# Altium PCB FC_V3_0_PCB_2021-06-05_17-41-46.pcbdoc
Units mil, origin at the board's own origin, x right, y up, seen from the top; angles counter-clockwise.
Board outline 4853.59 x 4855.51 mil, 2 copper layers (Top Layer, Bottom Layer); 91 components, 99 nets, 354 pads, 199 vias.
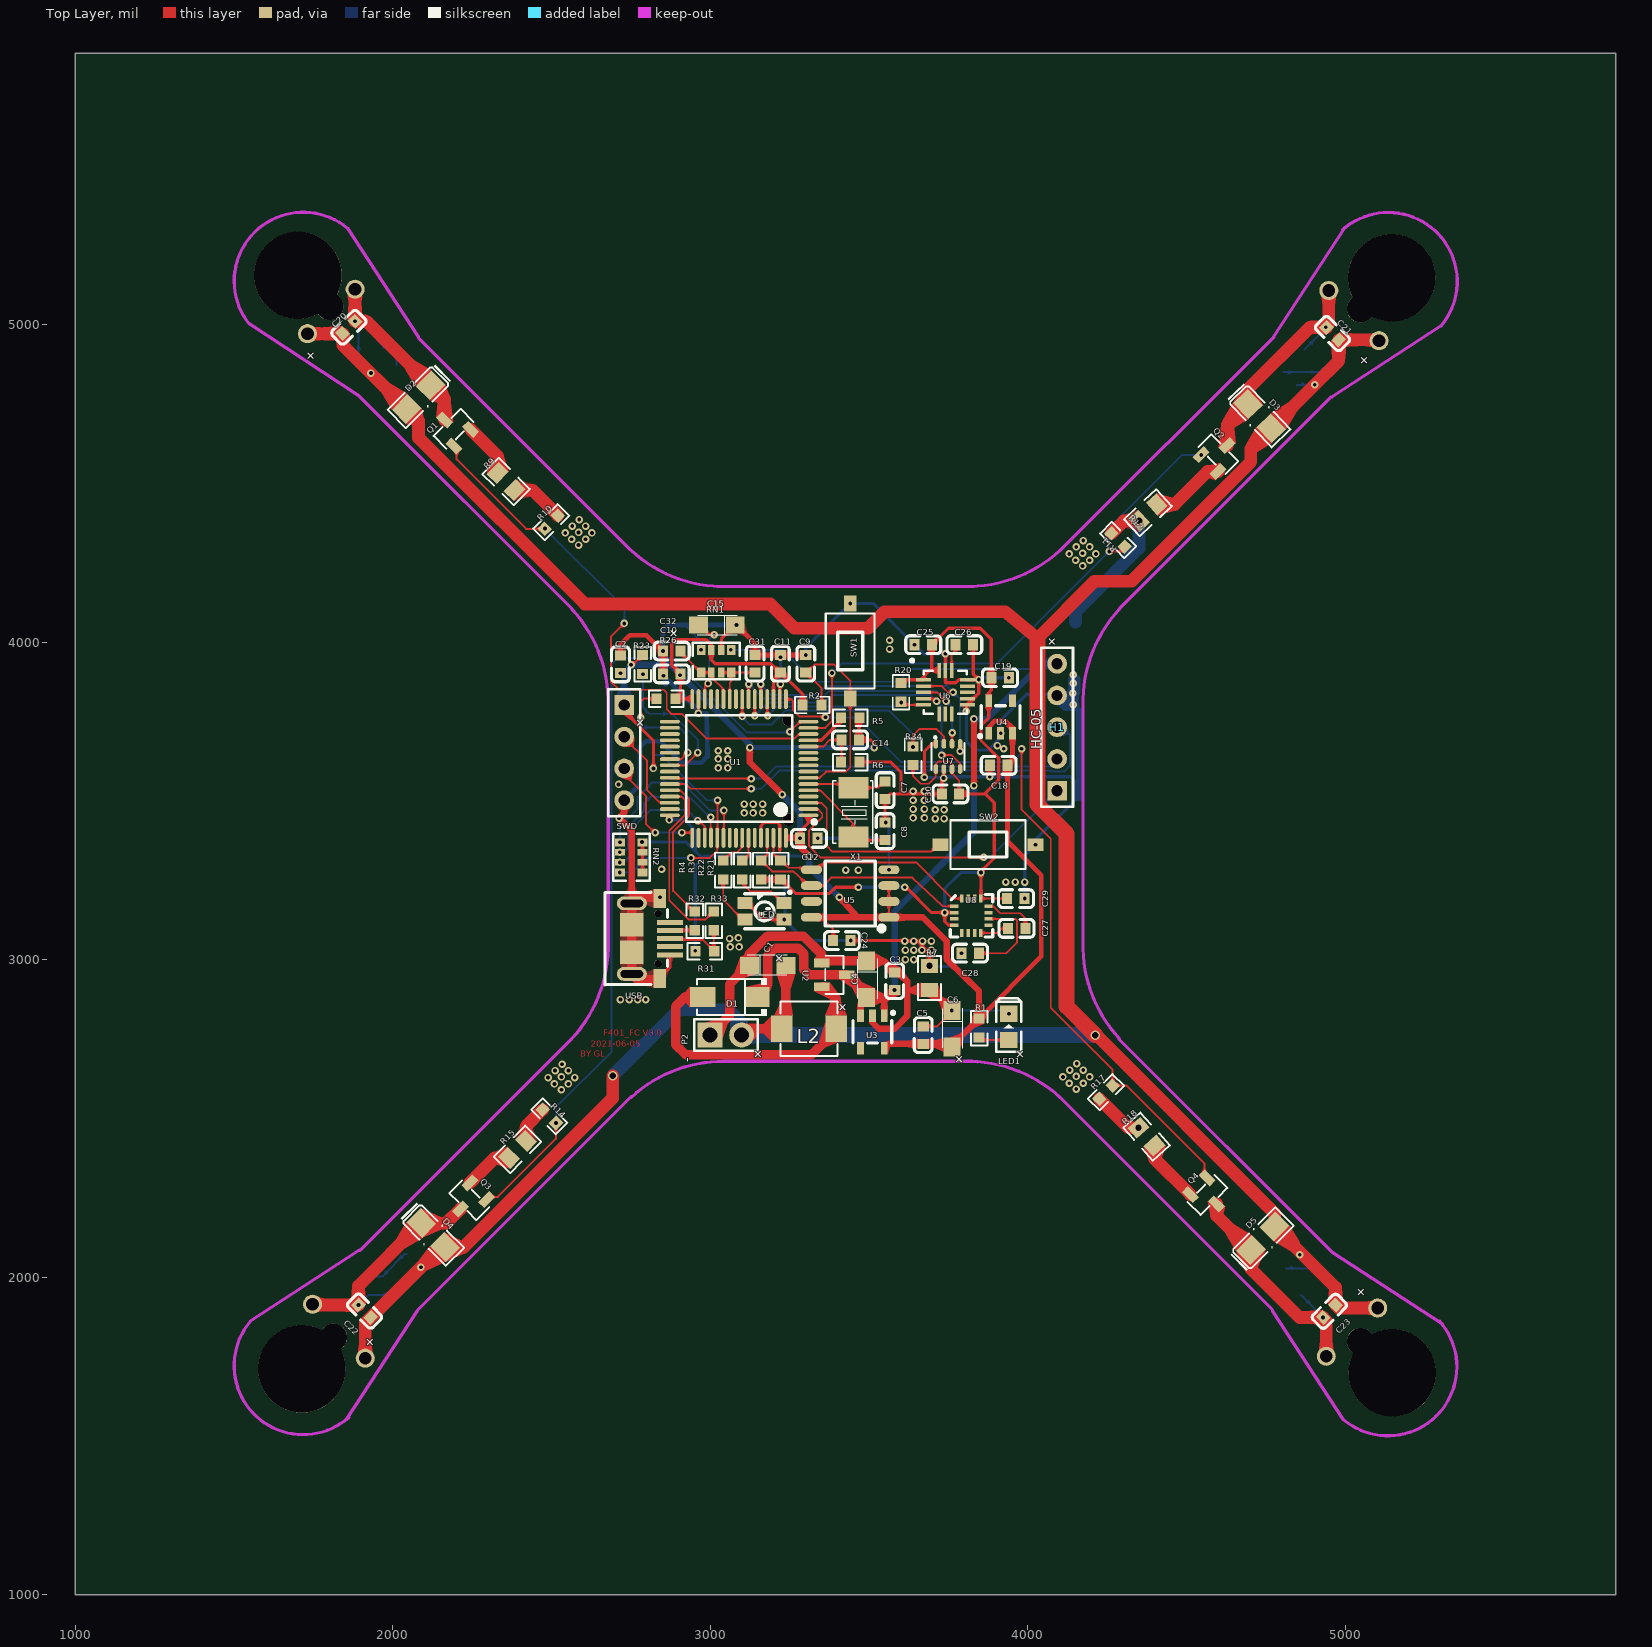
[diagram p0: Top Layer view]
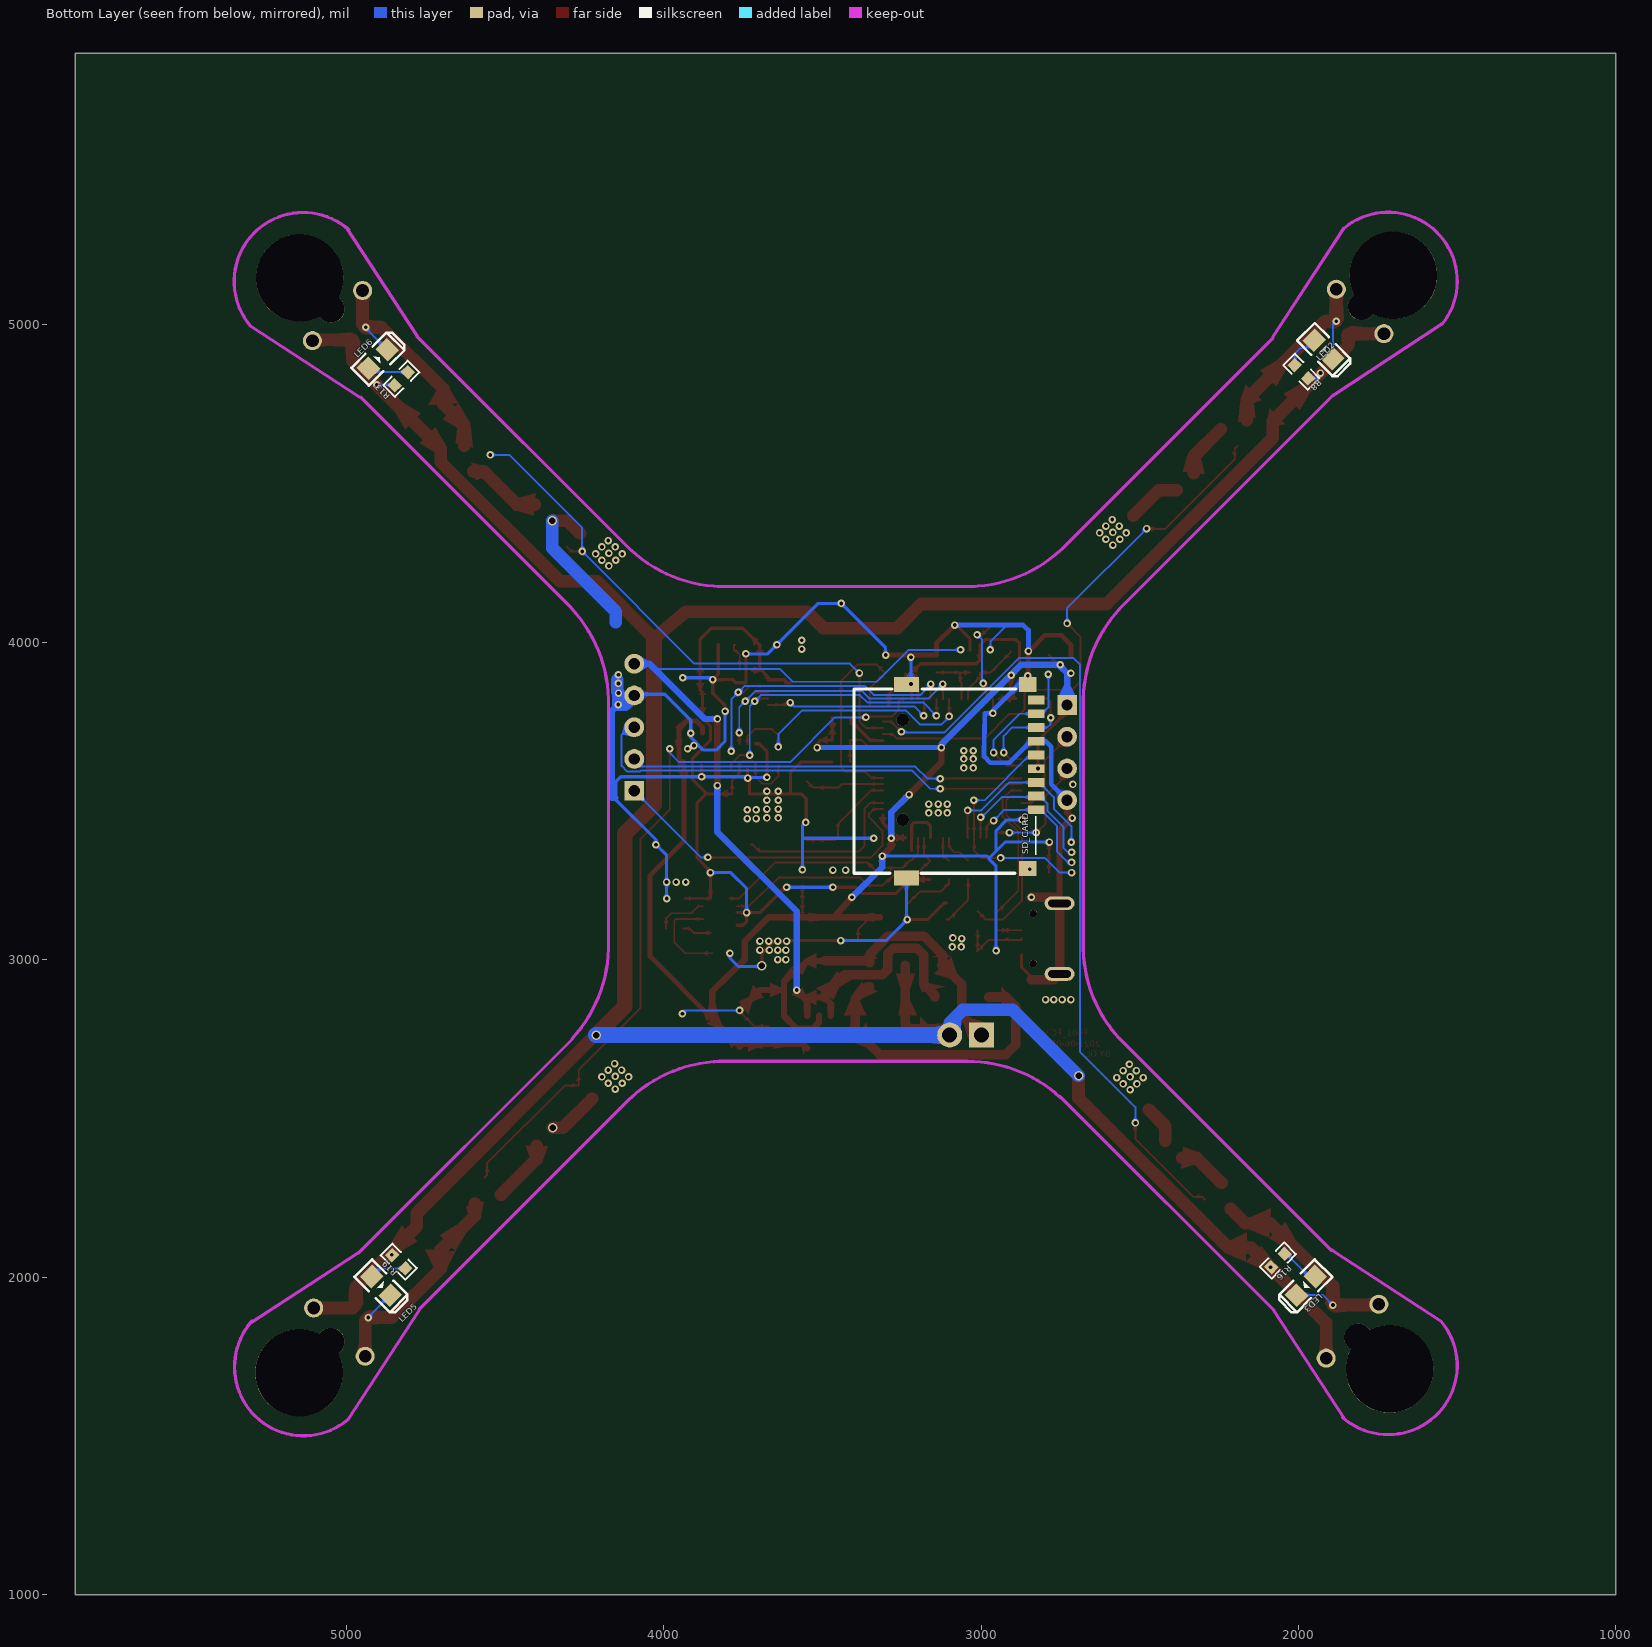
[diagram p1: Bottom Layer view, seen from below]

## Layer stack, top to bottom
Top Layer: signal copper (thickness not stored)
Dielectric: dielectric 12.6, FR-4, Dk 4.8
Bottom Layer: signal copper (thickness not stored)

## Board outline
5853.59,1000 1000,1000 1000,5855.51 5853.59,5855.51

## Components (designator, comment, footprint, x,y, rotation, side; value= is the part's Value field where it differs from the comment)
C1 "220uF" CASE-A_3216 3181.01,2982.67 r0 top
C2 "104" C0603 2717.01,3930.67 r270 top
C3 "104" C0603 3581.01,2932.67 r270 top
C4 "220uF" CASE-A_3216 3493.01,2938.67 r270 top
C5 "104" C0603 3671.01,2762.67 r270 top
C6 "220uF" CASE-A_3216 3761.01,2782.67 r270 top
C7 "20pF" C0603 3551.01,3534.67 r90 top
C8 "20pF" C0603 3551.01,3404.67 r270 top
C9 "104" C0603 3301.01,3932.67 r270 top
C10 "104" C0603 2879.01,3900.67 r0 top
C11 "104" C0603 3221.01,3932.67 r270 top
C12 "104" C0603 3311.01,3382.67 r180 top
C14 "104" C0603 3441.01,3692.67 r0 top
C15 "2.2uF" CASE-A_3216 3021.01,4054.67 r180 top
C18 "104" C0603 3909.01,3612.67 r0 top
C19 "104" C0603 3913.01,3888.67 r180 top
C20 "104" C0603 1861.01,4992.67 r224 top
C21 "104" C0603 4961.01,4972.67 r315 top
C22 "104" C0603 1911.01,1892.67 r315 top
C23 "104" C0603 4951.01,1892.67 r45 top
C24 "104" C0603 3415.01,3060.67 r180 top
C25 "104" C0603 3671.01,3992.67 r180 top
C26 "104" C0603 3801.01,3992.67 r0 top
C27 "0.22uF" C0603 3965.01,3098.67 r0 top
C28 "4.7uF" C0603 3819.01,3020.67 r0 top
C29 "104" C0603 3963.01,3192.67 r180 top
C30 "104" C0603 3757.01,3522.67 r0 top
C31 "104" C0603 3141.01,3932.67 r270 top
C32 "104" C0603 2879.01,3972.67 r0 top
D1 "SS14A" SMA_L4.3-W2.6-LS5.2-RD 3061.01,2882.67 r180 top
D2 "1N4148" D1206-RD 2081.01,4772.67 r225 top
D3 "1N4148" D1206-RD 4731.01,4712.67 r314 top
D4 "1N4148" D1206-RD 2127.01,2132.67 r315 top
D5 "1N4148" D1206-RD 4741.01,2122.67 r45 top
H1 "BLUETOOTH" HDR-F-2.54_1X5 4093.01,3732.67 r90 top
L2 "10uH" IND-SMD_L4.4-W4.2 3311.01,2782.67 r180 top
LED "RG" LED-ARRAY-SMD_3528-4P-L3.5-W2.8-TR 3171.01,3152.67 r0 top
LED1 "LED-0805_R" LED0805_RED#1 3941.01,2788.67 r90 top
LED2 "LED-0805_R" LED0805_RED#2 1921.01,4922.67 r45 bottom
LED3 "LED-0805_B" LED0805_BLUE 1977.01,1972.67 r135 bottom
LED5 "LED-0805_R" LED0805_RED#2 4891.01,1972.67 r45 bottom
LED6 "LED-0805_G" LED0805_GREEN 4901.01,4892.67 r315 bottom
P2 "3.7V 400mAH" HDR-TH_2P-P2.54-V-M 3049.01,2762.67 r0 top
Q1 "SI2302" SOT-23-3_L2.9-W1.3-P1.90-LS2.4-BR 2191.01,4672.67 r315 top
Q2 "SI2302" SOT-23-3_L2.9-W1.3-P1.90-LS2.4-BR 4601.01,4592.67 r225 top
Q3 "SI2302" SOT-23-3_L2.9-W1.3-P1.90-LS2.4-BR 2241.01,2242.67 r45 top
Q4 "SI2302" SOT-23-3_L2.9-W1.3-P1.90-LS2.4-BR 4567.01,2258.67 r135 top
R1 "4.7k" R0603#1 3847.01,2784.67 r270 top
R2 "10K" R0603#1 3321.01,3802.67 r180 top
R3 "4.7K" R0603#1 3101.01,3282.67 r90 top
R4 "4.7K" R0603#1 3041.01,3282.67 r90 top
R5 "0" R0603#1 3441.01,3762.67 r0 top
R6 "0" R0603#1 3441.01,3622.67 r0 top
R7 "0" R0805 3691.01,2942.67 r90 top
R8 "4.7k" R0603#2 1991.01,4852.67 r45 bottom
R9 "0" R0805 2357.01,4506.67 r315 top
R10 "10K" R0603#1 2499.01,4378.67 r225 top
R11 "10K" R0603#1 4285.01,4322.67 r315 top
R12 "0" R0805 4379.01,4408.67 r223 top
R13 "4.7k" R0603#2 4827.01,4830.67 r135 bottom
R14 "10K" R0603#1 2493.01,2506.67 r315 top
R15 "0" R0805 2393.01,2402.67 r45 top
R16 "4.7k" R0603#2 2065.01,2052.67 r135 bottom
R17 "10K" R0603#1 4247.01,2582.67 r45 top
R18 "0" R0805 4375.01,2442.67 r132 top
R19 "4.7k" R0603#2 4835.01,2048.67 r225 bottom
R20 "4.7k" R0603#1 3601.01,3842.67 r90 top
R21 "4.7K" R0603#1 3221.01,3282.67 r90 top
R22 "4.7K" R0603#1 3161.01,3282.67 r90 top
R23 "10K" R0603#1 2787.01,3930.67 r270 top
R26 "10K" R0603#1 2861.01,3822.67 r180 top
R31 "1.5k" R0603#1 2983.01,3026.67 r180 top
R32 "22" R0603#1 2951.01,3122.67 r90 top
R33 "22" R0603#1 3011.01,3122.67 r90 top
R34 "4.7k" R0603#1 3639.01,3642.67 r90 top
RN1 "100K" RES-ARRAY-SMD_0603-8P-L3.2-W1.6-BL 3019.01,3940.67 r0 top
RN2 "10K" RES-ARRAY-SMD_0603-8P-L3.2-W1.6-BL 2751.01,3322.67 r270 top
SD_CARD "TF-01A" TF-SMD_TF-01A 3031.01,3562.64 r90 bottom
SW1 "RESET" SW-SMD_L6.0-W3.9-LS7.7 3441.01,3972.67 r90 top
SW2 "MODE" SW-SMD_L6.0-W3.9-LS7.7 3875.01,3362.67 r0 top
SWD "SWD" HDR-M-2.54_1X4 2729.01,3652.67 r270 top
U1 "STM32F401RCT6" LQFP-64_L10.0-W10.0-P0.50-LS12.0-BL 3091.01,3602.67 r90 top
U2 "ME2108A50M3G" SOT-23-3_L2.9-W1.3-P1.90-LS2.4-BR 3391.01,2952.67 r180 top
U3 "RT9013-33GB" SOT-23-5_L3.0-W1.7-P0.95-LS2.8-BR 3511.01,2772.67 r90 top
U4 "RT9013-33GB" SOT-23-5_L3.0-W1.7-P0.95-LS2.8-BR 3915.01,3764.67 r270 top
U5 "AIP24C02" SOP-8_L5.0-W4.0-P1.27-LS6.2-BL 3441.01,3208.67 r90 top
U6 "ICM-20602" LGA-16_L3.0-W3.0-ICM20602 3741.01,3842.67 r270 top
U7 "BMP280" SENSOR-TH_BMP280-BL 3749.01,3640.67 r270 top
U8 "C-HMC5883L" C-LCC16 3823.01,3138.67 r0 top
USB "MICRO5.9MMUSB" MICRO-USB-SMD_5P-P0.65-H-F_MICRO5.9MMUSB 2812.99,3066.71 r270 top
X1 "8MHz" SMD-5032_2P 3451.05,3464.63 r270 top

## Footprints (in the part's own frame and the unit in brackets; to place one, negate y for a bottom-side part, rotate by r counter-clockwise, add the part's x,y. Pads: shape width x height; smd on the part's side, far side on the other; paste and mask are expansions set on the pad)
C0603 [mm]
  rect 0.8x0.9 smd: 1(-0.7,0) 2(0.7,0)
  silkscreen extent -1.41,-0.71 1.39,0.72
C-LCC16 [mil]
  rect 25.6x11 smd: 1(-54,30) 2(-54,10) 3(-54,-10) 4(-54,-30) 9(54,-30) 10(54,-10) 11(54,10) 12(54,30)
  rect 11x25.6 smd: 5(-30,-54) 6(-10,-54) 7(10,-54) 8(30,-54) 13(30,54) 14(10,54) 15(-10,54) 16(-30,54)
  silkscreen extent -67,-67 67,67
CASE-A_3216 [mil]
  rect 59.05x53.5 smd: 1(57.61,0)
  rect 59.06x53.5 smd: 2(-57.61,0)
  silkscreen extent -65,-30 61,33
D1206-RD [mm]
  rect 1.785x1.62 smd: 1(-1.343,0) 2(1.342,0)
  silkscreen extent -2.77,-1.08 2.46,1.08
HDR-F-2.54_1X5 [mil]
  rect 62x62 hole 35: 1(-200,0)
  round 62 hole 35: 2(-100,0) 3(0,0) 4(100,0) 5(200,0)
  silkscreen extent -250,-50 250,50
HDR-M-2.54_1X4 [mil]
  rect 62x62 hole 35: 1(-150,0)
  round 62 hole 35: 2(-50,0) 3(50,0) 4(150,0)
  silkscreen extent -200,-50 200,50
HDR-TH_2P-P2.54-V-M [mm]
  rect 2x2 hole 1.2: 1(-1.27,0)
  round 2 hole 1.2: 2(1.27,0)
  silkscreen extent -2.54,-1.27 2.54,1.27
IND-SMD_L4.4-W4.2 [mm]
  rect 1.724x2.12 smd: 1(2.178,0) 2(-2.178,0)
  silkscreen extent -2.28,-2.18 2.28,2.18
LED0805_BLUE [mil]
  rect 51.2x55.1 smd: 1(41.35,0) 2(-41.35,0)
  silkscreen extent -91,-39 79,39
LED0805_GREEN [mil]
  rect 51.2x55.1 smd: 1(41.35,0) 2(-41.35,0)
  silkscreen extent -91,-39 79,39
LED0805_RED#1 [mil]
  rect 51.2x55.1 smd: 1(-41.35,0) 2(41.35,0)
  silkscreen extent -79,-39 91,39
LED0805_RED#2 [mil]
  rect 51.2x55.1 smd: 1(41.35,0) 2(-41.35,0)
  silkscreen extent -91,-39 79,39
LED-ARRAY-SMD_3528-4P-L3.5-W2.8-TR [mm]
  rect 1.2x0.95 smd: 1(1.55,0.665) 2(1.55,-0.665) 3(-1.55,-0.665) 4(-1.55,0.665)
  silkscreen extent -1.6,-1.4 2.13,1.62
LGA-16_L3.0-W3.0-ICM20602 [mm]
  rect 0.28x1.2 smd: 1(-1,-1.75) 2(-0.5,-1.75) 3(0,-1.75) 4(0.5,-1.75) 5(1,-1.75) 9(1,1.75) 10(0.5,1.75) 11(0,1.75) 12(-0.5,1.75) 13(-1,1.75)
  rect 1.2x0.28 smd: 6(1.75,-0.5) 7(1.75,0) 8(1.75,0.5) 14(-1.75,0.5) 15(-1.75,0) 16(-1.75,-0.5)
  silkscreen extent -2.66,-2.79 1.73,1.73
LQFP-64_L10.0-W10.0-P0.50-LS12.0-BL [mm]
  oval 0.3x1.6 smd: 1(-3.75,-5.55) 2(-3.25,-5.55) 3(-2.75,-5.55) 4(-2.25,-5.55) 5(-1.75,-5.55) 6(-1.25,-5.55) 7(-0.75,-5.55) 8(-0.25,-5.55) 9(0.25,-5.55) 10(0.75,-5.55) 11(1.25,-5.55) 12(1.75,-5.55) 13(2.25,-5.55) 14(2.75,-5.55) 15(3.25,-5.55) 16(3.75,-5.55) 33(3.75,5.55) 34(3.25,5.55) 35(2.75,5.55) 36(2.25,5.55) 37(1.75,5.55) 38(1.25,5.55) 39(0.75,5.55) 40(0.25,5.55) 41(-0.25,5.55) 42(-0.75,5.55) 43(-1.25,5.55) 44(-1.75,5.55) 45(-2.25,5.55) 46(-2.75,5.55) 47(-3.25,5.55) 48(-3.75,5.55)
  oval 1.6x0.3 smd: 17(5.55,-3.75) 18(5.55,-3.25) 19(5.55,-2.75) 20(5.55,-2.25) 21(5.55,-1.75) 22(5.55,-1.25) 23(5.55,-0.75) 24(5.55,-0.25) 25(5.55,0.25) 26(5.55,0.75) 27(5.55,1.25) 28(5.55,1.75) 29(5.55,2.25) 30(5.55,2.75) 31(5.55,3.25) 32(5.55,3.75) 49(-5.55,3.75) 50(-5.55,3.25) 51(-5.55,2.75) 52(-5.55,2.25) 53(-5.55,1.75) 54(-5.55,1.25) 55(-5.55,0.75) 56(-5.55,0.25) 57(-5.55,-0.25) 58(-5.55,-0.75) 59(-5.55,-1.25) 60(-5.55,-1.75) 61(-5.55,-2.25) 62(-5.55,-2.75) 63(-5.55,-3.25) 64(-5.55,-3.75)
  silkscreen extent -4.43,-6.16 4.25,4.25
MICRO-USB-SMD_5P-P0.65-H-F_MICRO5.9MMUSB [mm]
  rect 0.4x2.1 smd: 1(-1.3,1.525) 2(-0.65,1.525) 3(0,1.525) 4(0.65,1.525) 5(1.3,1.525)
  rect 1.5x1 smd: 6(-3.2,0.725) 6(3.2,0.725)
  oval 1.1x2.399 hole 0.6 slot 1.8 at 90 deg: 6(-2.825,-1.525) 6(2.825,-1.525)
  rect 1.9x1.9 smd: 6(-1.1,-1.525) 6(1.1,-1.525)
  round 0.6 hole 0.6 unplated: ""(-2,0.575) ""(2,0.575)
  silkscreen extent -3.71,-3.67 3.7,1.32
R0603#1 [mil]
  rect 31.75x34.02 smd: 1(-29.66,0) 2(29.66,0)
  silkscreen extent -55,-26 55,26
R0603#2 [mil]
  rect 31.75x34.02 smd: 1(29.65,0) 2(-29.65,0)
  silkscreen extent -55,-26 55,26
R0805 [mil]
  rect 44.59x54.21 smd: 1(-38.04,0) 2(38.04,0)
  silkscreen extent -69,-36 69,36
RES-ARRAY-SMD_0603-8P-L3.2-W1.6-BL [mm]
  rect 0.65x0.8 smd: 1(-1.2,-0.9) 4(1.2,-0.9) 5(1.2,0.9) 8(-1.2,0.9)
  rect 0.5x0.8 smd: 2(-0.4,-0.9) 3(0.4,-0.9) 6(0.4,0.9) 7(-0.4,0.9)
  silkscreen extent -1.87,-1.45 1.87,1.47
SENSOR-TH_BMP280-BL [mm]
  oval 0.767x0.364 smd: 1(-1.008,-0.975) 2(-1.008,-0.325) 3(-1.008,0.325) 4(-1.008,0.975) 5(1.009,0.975) 6(1.009,0.325) 7(1.009,-0.325) 8(1.009,-0.975)
  silkscreen extent -1.61,-1.33 1.08,1.33
SMA_L4.3-W2.6-LS5.2-RD [mm]
  rect 2.046x1.62 smd: 1(-2.16,0) 2(2.16,0)
  silkscreen extent -2.98,-1.5 2.6,1.5
SMD-5032_2P [mil]
  rect 66.92x94.48 smd: 1(-77.59,0.01) 2(77.59,-0.01)
  silkscreen extent -99,-66 98,61
SOP-8_L5.0-W4.0-P1.27-LS6.2-BL [mm]
  oval 0.7x1.7 smd: 1(-1.905,-3.1) 2(-0.635,-3.1) 3(0.635,-3.1) 4(1.905,-3.1) 5(1.905,3.1) 6(0.635,3.1) 7(-0.635,3.1) 8(-1.905,3.1)
  silkscreen extent -2.99,-2.71 2.6,2
SOT-23-3_L2.9-W1.3-P1.90-LS2.4-BR [mm]
  rect 1.25x0.7 smd: 1(1,-0.95) 2(1,0.95) 3(-1,0)
  silkscreen extent -0.73,-1.53 0.73,1.53
SOT-23-5_L3.0-W1.7-P0.95-LS2.8-BR [mm]
  rect 1x0.55 smd: 1(1.3,-0.95) 2(1.3,0) 3(1.3,0.95) 4(-1.3,0.95) 5(-1.3,-0.95)
  silkscreen extent -0.9,-1.78 1.65,1.55
SW-SMD_L6.0-W3.9-LS7.7 [mm]
  rect 1.3x1 smd: 1(-3.8,0) 2(3.8,0)
  silkscreen extent -3,-1.95 3,1.95
TF-SMD_TF-01A [mm]
  rect 0.7x1.3 smd: 1(-2.292,-5.2) 2(-1.192,-5.198) 3(-0.096,-5.2) 4(1.004,-5.2) 5(2.103,-5.2) 6(3.201,-5.2) 7(4.297,-5.2) 8(5.395,-5.2) 9(6.499,-5.2)
  rect 1.2x1.397 smd: 10(7.747,-4.502) 13(-6.985,-4.502)
  rect 1.2x2 smd: 11(7.747,5.2) 12(-7.747,5.2)
  round 1 hole 1 unplated: ""(-3.084,5.487) ""(4.915,5.49)
  silkscreen extent -7.37,-5.14 7.37,9.4

## Free pads (board coordinates)
  round 60 hole 40: 1(1731.01,4972.67) 1(1747.01,1914.67) 1(1913.01,1744.67) 1(4941.01,1750.67) 1(4949.01,5108.67) 1(5103.01,1902.67) 1(5107.01,4950.67) 2(1881.01,5112.67)
  round 275.59 hole 275.59 unplated: ""(1701.01,5156.67) ""(1713.01,1710.67) ""(5147.01,5148.67) ""(5149.01,1698.67)
  round 86.61 hole 86.61 unplated: ""(1801.01,5058.67) ""(1813.01,1810.67) ""(5049.01,1796.67) ""(5049.01,5050.67)

## Via types
v1: diameter 23.62, hole 12, Top Layer to Bottom Layer, 101 vias
v2: diameter 23.62, hole 11.81, Top Layer to Bottom Layer, 93 vias
v3: diameter 30, hole 20, Top Layer to Bottom Layer, 5 vias

## Nets (pads, with @x,y where several pads share a name; then routed paths per layer and width w, separated by ;. In a path a pad name is that pad's centre, name@x,y a point inside that pad or via, vN(x,y) a via of type N, cw(c..) or ccw(c..) an arc to the next point about the centre after c; other vN are vias at no path point)
+3.3V: C2.2 C5.2 C6.1 C10.2 C11.2 C12.2 C14.2 C18.2 C24.2 R1.1 R2.2 R5.2 R23.1 R26.1 R31.2 RN1.7 RN2.5 RN2.6 RN2.7 RN2.8 SD_CARD.4 SWD.1 U1.1 U1.19 U1.32 U1.48 U1.64 U3.5 U4.1 U4.3 U5.1 U5.2 U5.3 U5.8 | length 6746.7
  Top Layer w6: v2@2750.51,3929.17 2755.81,3929.17 R23.1@2787.01,3960.37 ; RN2.5@2786.41,3275.47 RN2.8 ; U5.8@3318.91,3133.67 3350.01,3133.67 3387.41,3096.27 C24.2@3387.41,3060.67 ; U5.1 3563.11,3149.67 U5.3
  Top Layer w10: SWD.1 2729.01,3782.67 2821.01,3690.67 v2(2821.01,3602.67) ; v2(2871.01,3440.67) 2872.51,3442.17 U1.48@2872.51,3455.07 ; U1.32 2941.91,3822.67 R26.1 2906.61,3838.57 C10.2 2879.01,3928.27 2879.01,3932.67 2879.01,3996.67 2891.01,4008.67 2987.01,4008.67 3003.31,3992.47 RN1.7 3003.31,3944.97 3015.51,3932.67 3191.01,3932.67 3218.61,3905.07 C11.2 ; U1.19 3199.31,3883.47 C11.2 ; U1.64 3281.91,3384.17 3283.41,3382.67 3283.41,3405.07 3309.51,3431.17 U1.1@3309.51,3455.07 ; R2.2@3291.31,3802.67 3291.31,3836.37 3222.61,3905.07 C11.2 ; R5.2 3468.61,3760.57 C14.2 3505.01,3692.67 3517.01,3680.67 v1(3516.98,3668.67) ; v1(3516.98,3668.67) 3516.98,3666.7 v1(3516.98,3668.67)
  Top Layer w15: R1.1@3847.01,2814.37 4043.01,3010.37 4043.01,3266.27 3936.61,3372.67 C18.2 3952.41,3628.47 U4.3 ; U4.1 3877.61,3733.27 3897.01,3752.67 3929.01,3752.67 3952.41,3729.27 U4.3@3952.41,3715.47
  Top Layer w20: v1(3125.01,3668.67) 3125.01,3622.67 v1(3227.01,3520.67) ; C12.2@3283.41,3382.67 3283.41,3355.27 v2(3311.92,3326.77) ; U5.8@3318.91,3133.67 3670.01,3133.67 3745.01,3058.67 3745.01,3000.67 3847.01,2900.67 3847.01,2814.37 3767.71,2735.07 C6.1@3761.01,2735.07 ; v1(3407.01,3196.67) 3464.01,3133.67 ; U3.5 3562.01,2735.07 C5.2 C6.1@3761.01,2735.07 ; C6.1 C6.1@3761.01,2735.07
  Bottom Layer w10: v2(2785.01,3370.67) 2925.01,3370.67 2953.01,3342.67 ; v2(2871.01,3440.67) 2919.01,3440.67 2953.01,3406.67 2953.01,3342.67 ; v2(2953.01,3028.67) 2953.01,3294.67 2975.01,3316.67 2975.01,3320.67 ; v2(3311.92,3326.77) 2981.11,3326.77 2975.01,3320.67 ; 2953.01,3342.67 2975.01,3320.67
  Bottom Layer w15: v1(3125.01,3668.67) v1(3516.98,3668.67)
  Bottom Layer w20: SWD.1 2729.01,3902.67 ; v1(3125.01,3668.67) 3125.01,3678.67 2874.55,3929.13 v2(2750.51,3929.13) 2750.51,3924.17 2729,3902.67 ; v1(3227.01,3520.67) 3283.01,3464.67 v1(3283.01,3382.67) ; v2(3311.92,3326.77) 3311.93,3291.75 v1(3407.01,3196.67) ; 2729,3902.67 v2(2717.01,3902.67) 2729.01,3902.67
  other v2: 2905.01,3896.67
+3.3V_SENSOR: C19.2 C25.1 C29.2 C30.2 R20.2 R21.1 R22.1 R34.1 U4.5 U6.1 U6.16 U7.6 U7.8 U8.2 U8.4 U8.13 | length 2949.1
  Top Layer w6: R34.1 3639.01,3578.67 3663.01,3554.67 3689.01,3554.67 3710.61,3576.27 U7.8 3710.61,3616.27 3719.01,3624.67 3753.01,3624.67 3761.81,3615.87 U7.6 3761.81,3587.47 3784.61,3564.67 C30.2 ; U8.13 3915.01,3192.67 C29.2@3935.41,3192.67
  Top Layer w10: R22.1 3224.71,3252.97 3269.01,3208.67 3375.01,3208.67 3395.01,3228.67 v2(3467.01,3228.67) 3397.01,3228.67 ; R20.2@3601.01,3872.37 3611.31,3872.37 3621.01,3882.07 3672.11,3882.07 3672.11,3891.77 3691.91,3911.57 U6.16 ; v2(3613.01,3228.67) 3617,3228.67 3697,3148.67 v2(3739.01,3148.67) ; C25.1@3697.81,3992.77 3697.81,3911.67 U6.16@3720.61,3911.67 ; C25.1 3750.61,4044.67 3851.01,4044.67 3885.41,4010.27 3885.41,3888.67 3885.41,3849.07 3877.61,3841.27 U4.5 3877.61,3765.27 ; U8.4 3751.01,3108.67 3739.01,3120.67 v2(3739.01,3148.67) ; U8.2 v2(3739.01,3148.67) ; U8.13 3853.01,3220.67 v2(3853.01,3274.67) 3853.01,3278.67 3895.01,3320.67 3895.01,3494.67 3867.01,3522.67 C30.2 3865.01,3522.67 3909.01,3566.67 3909.01,3634.67 3853.01,3690.67 3853.01,3736.67 3877.01,3762.67
  Bottom Layer w10: v2(3467.01,3228.67) v2(3613.01,3228.67) ; v2(3739.01,3148.67) 3739.01,3224.67 3789.01,3274.67 v2(3853.01,3274.67)
+5V: C3.2 C4.1 D1.1 H1.5 RN1.5 U2.3 U3.1 U3.3 | length 3114.7
  Top Layer w20: U3.3 3473.61,2861.67 C4.1 3559.41,2881.07 3561.01,2882.67 ; U3.1@3548.41,2823.87 3548.41,2870.07 3561.01,2882.67 ; C3.2 3581.01,2902.67 3561.01,2882.67 ; v1(3831.01,3548.67) v1(3831.01,3758.67)
  Top Layer w30: D1.1@3146.01,2882.67 3146.01,2887.67 3181.01,2922.67 3181.01,3014.67 3203.01,3036.67 3277.01,3036.67 3295.01,3018.67 3295.01,2968.67 3311.01,2952.67 U2.3 3493.01,2890.07 C4.1
  Bottom Layer w6: v2@3064.91,3975.87 3229.01,3975.87 3329.01,3875.87 3592.91,3875.87 3632.91,3915.87 4028.91,3915.87 4028.91,3909.57
  Bottom Layer w20: v1@3581.01,2905.07 3581.01,3152.67 3831.01,3402.67 v1(3831.01,3548.67) ; v1(3831.01,3758.67) 3871.01,3758.67 4045.01,3932.67 H1.5
  other v1: 3581.01,2904.67
  other v2: 3065.01,3976.67
ADC_IN1: C32.2 RN1.1 RN1.2 U1.27 | length 232
  Top Layer w6: C32.2 2906.61,3969.07 2970.41,3905.27 2971.81,3905.27 2997.31,3905.27 RN1.2@3005.21,3897.27 ; RN1.2@3003.31,3905.27 3003.31,3890.37 3041.81,3851.87 U1.27
ADC_IN2: C31.2 RN1.3 RN1.4 U1.26 | length 197.6
  Top Layer w6: RN1.3@3034.81,3905.27 3060.21,3905.27 RN1.4@3068.21,3897.27 ; U1.26 3061.51,3872.67 3066.21,3877.47 3066.21,3905.27 3066.41,3905.07 C31.2
D3_1: C21.1 D3.1 LED6.2 pad.1@4949.01,5108.67 Q2.3 | length 751.5
  Top Layer w40: Q2.3 4628.81,4685.27 D3.1 4694.31,4797.97 4889.01,4992.67 v2(4939.01,4992.67) ; C21.1 4939.51,4992.17 v2(4939.01,4992.67) ; pad.1@4949.01,5108.67 4949.01,5002.67 v2(4939.01,4992.67)
  Bottom Layer w6: LED6.2 4939.01,4989.17 v2(4939.01,4992.67)
D4_1: C22.1 D4.1 LED3.2 pad.1@1747.01,1914.67 Q3.3 | length 755.3
  Top Layer w40: pad.1@1747.01,1914.67 1749.51,1912.17 v2(1891.51,1912.17) 1891.51,1971.97 2089.61,2170.07 2168.41,2170.07 Q3.3@2213.21,2214.87
  Bottom Layer w6: v2(1891.51,1912.17) 1922.81,1943.47 LED3.2@2006.21,1943.47
FOSC1: C7.2 U1.6 X1.1 | length 254.4
  Top Layer w6: U1.6 3439.81,3553.47 3451.01,3542.27 3529.81,3542.27 3549.81,3562.27 C7.2@3551.01,3562.27
FOSC2: C8.2 U1.5 X1.2 | length 330.8
  Top Layer w6: U1.5 3345.91,3533.77 3451.01,3428.67 3451.01,3387.07 3461.01,3377.07 C8.2
GND: C2.1 C7.1 C8.1 C9.1 C10.1 C11.1 C12.1 C15.2 C18.1 C19.1 C24.1 C25.2 C26.2 C28.1 C29.1 C30.1 C31.1 C32.1 H1.4 LED.2 LED.4 R6.2 R7.2 R9.2 R10.1 R11.1 R12.2 R14.1 R15.2 R17.1 R18.2 RN1.6 RN1.8 SD_CARD.6 SD_CARD.10 SD_CARD.11 SD_CARD.12 SD_CARD.13 SW1.2 SW2.2 SWD.4 U1.18 U1.31 U1.47 U1.60 U1.63 U4.2 U5.4 U6.9 U6.10 U6.11 U6.12 U6.13 U6.15 U7.1 U7.7 USB.5 USB.6 | length 9253
  Top Layer w6: v2(2963.01,3776.67) U1.31
  Top Layer w10: USB.6@2841.51,2936.77 2841.51,2945.17 2873.01,2976.67 USB.5 ; RN1.6@3035.11,3974.67 3035.11,4010.97 3077.41,4053.17 C15.2@3079.01,4053.17 ; LED.4 3116.81,3178.87 3169.01,3126.67 v2(3233.01,3126.67) ; U1.60 3159.91,3421.67 3171.01,3432.67 3211.01,3432.67 3218.91,3424.77 3218.91,3384.17 3219.01,3384.07 3219.01,3344.07 ; U1.18@3218.91,3821.17 3218.91,3856.67 3221.41,3859.07 v2(3221.37,3868.5) ; C11.1 3221.38,3959.86 v2(3221.37,3952.75) ; v2(3442.57,3060.67) 3611.01,3060.67 v1(3613.01,3058.67) v1(3641.01,3058.67) 3653.01,3058.67 3691.01,3020.67 v3(3691.01,2980.67) ; R6.2 3569.01,3622.67 3601.01,3590.67 3601.01,3522.67 ; C8.1@3551.01,3432.27 C7.1 3566.61,3522.67 3729.41,3522.67 3729.41,3567.07 v2(3735.01,3572.67) 3736.21,3573.87 U7.7 ; v2(3675.01,3574.67) 3675.01,3656.67 3698.71,3680.37 U7.1 ; v2@3741.01,3963.77 3741.01,3911.67 U6.15 3741.01,3872.67 3773.01,3872.67 3783.01,3882.67 v2(3845.78,3882.68) ; v2(3807.01,3782.67) 3807.01,3803.27 U6.9 3845.81,3839.17 v2(3845.78,3882.68) ; U6.13@3809.91,3882.07 3845.21,3882.07 v2(3845.78,3882.68) ; C26.2 3828.61,3899.87 v2(3845.78,3882.68) ; v2(3881.01,3576.67) 3881.01,3612.27 C18.1@3881.41,3612.67
  Top Layer w15: C2.1@2717.01,3958.27 2717.01,3992.67 2747.01,4022.67 2799.01,4022.67 2849.01,3972.67 2851.41,3972.67 C10.1@2851.41,3896.27 ; C10.1@2851.41,3900.67 C10.1@2851.41,3896.27 ; C15.2 v2(3083.01,4054.67) 3141.01,3996.67 3141.01,3960.27 3141.41,3959.87 C9.1@3300.91,3959.87 ; C10.1@2851.41,3896.27 v2(2853.01,3894.67) C10.1@2851.41,3896.27
  Top Layer w20: SWD.4 2729.01,3462.77 v1(2712.71,3446.46) 2753.01,3406.17 USB.6@2753.01,3177.87
  Top Layer w30: USB.6@2841.51,2936.77 2771.71,2936.77 2753.01,2955.47 2753.01,3023.37 2753.01,3109.97 2753.01,3177.87 2771.71,3196.57 v2(2841.55,3196.59)
  Top Layer w40: R9.2 2439.81,4479.77 R10.1@2520.01,4399.67 ; R15.2 2419.91,2475.47 R14.1@2472.01,2527.67 ; R17.1 4316.81,2470.97 R18.2@4349.51,2470.97 ; R11.1@4264.01,4343.67 4303.11,4382.77 R12.2@4351.21,4382.77
  Bottom Layer w6: v2(2853.01,3894.67) 2853.01,3868.47 SD_CARD.10@2853.81,3867.67 ; 2867.01,4054.67 2919,4054.67 2971.01,4002.67 v2(2971.01,3976.67)
  Bottom Layer w10: v2(3221.37,3868.5) v2(3221.37,3952.75) ; SD_CARD.12@3235.71,3257.67 3235.71,3129.37 v2(3233.01,3126.67) 3299.01,3060.67 v2(3442.57,3060.67) ; v2(3300.9,3959.84) 3300.91,3982.57 v2(3441.01,4122.67) 3513.45,4122.67 v2(3643.45,3992.67) 3672.34,3963.78 v2(3741.06,3963.78) ; v2(3338.57,3382.67) 3563.06,3382.67 ; v2(3553.01,3432.67) 3563.06,3422.62 v2(3563.06,3283.67) ; v2(3675.01,3574.67) 3733.01,3574.67 v2(3735.01,3572.67) 3739.01,3576.67 v2(3881.01,3576.67) 4135.01,3576.67 4151.01,3560.67 4151.01,3504.67 4024.61,3378.27 v2(4024.62,3362.67) 3991.01,3329.06 v1(3991.01,3244.67) 3991.01,3193.11 v2(3990.57,3192.67) ; v3(3691.01,2980.67) 3693.01,2978.67 3765.01,2978.67 3791.45,3005.11 v2(3791.45,3020.67) ; v2@3807.01,3778.67 3807.01,3688.67 3835.01,3660.67 3875.01,3660.67 3915.01,3700.67 v2@3915.01,3709.49 ; v2(3845.78,3882.68) 3851.79,3888.67 v2(3940.57,3888.67) ; v2(3915.01,3713.49) 3915.01,3754.67 3997.01,3836.67 4089.01,3836.67 H1.4
  Bottom Layer w15: SWD.4 2779.01,3552.67 2779.01,3670.67 2797.01,3688.67 SD_CARD.6 2843.01,3688.67 2911.01,3620.67 2971.01,3620.67 2991.01,3640.67 2989.01,3776.67 v2(2963.01,3776.67) 2963.01,3784.67 v2(2853.01,3894.67) 2859.01,3888.67 SD_CARD.10@2859.01,3866.67 ; v2(2851.01,3972.67) 2851.01,4038.67 2867.01,4054.67 v2(3083.01,4054.67)
  Bottom Layer w20: H1.4 4115.01,3832.67 4163.01,3784.67 4163.01,3510.67 4153.01,3510.67
  Bottom Layer w40: H1.4 4121.75,3803.93 v1(4143.42,3803.94) 4142.64,3804.71 v1(4142.63,3840.16) 4147.01,3844.53 4147.01,3882.67 ; 4151.01,4064.16 4151.01,4096.67 4351.21,4296.87 v3@4351.21,4382.77
  other v1: 2531.01,2590.67 4153.01,2592.67 2509.01,2608.67 2553.01,2608.67 4131.01,2610.67 4175.01,2610.67 2489.01,2628.67 2573.01,2628.67 2531.01,2630.67 4111.01,2630.67 4195.01,2630.67 4153.01,2632.67 2511.01,2650.67 2553.01,2650.67 4133.01,2652.67 4175.01,2652.67 2533.01,2670.67 4155.01,2672.67 2717.01,2874.67 2745.01,2874.67 2771.01,2874.67 2797.01,2874.67 3615.01,3000.67 3641.01,3000.67 3615.01,3030.67 3641.01,3030.67 3667.01,3030.67 3697.01,3030.67 3063.01,3040.67 3091.01,3040.67 3669.01,3058.67 3697.01,3058.67 3061.01,3066.67 3089.01,3068.67 3931.01,3244.67 3961.01,3244.67 3427.01,3282.67 3467.01,3282.67 3709.01,3444.67 3737.01,3444.67 3639.01,3446.67 3675.01,3446.67 3107.01,3462.67 3135.01,3462.67 3165.01,3462.67 3709.01,3472.67 3737.01,3472.67 3639.01,3474.67 3675.01,3474.67 3107.01,3490.67 3135.01,3490.67 3165.01,3490.67 3639.01,3502.67 3675.01,3502.67 3639.01,3530.67 3675.01,3530.67 2711.01,3552.67 3025.01,3604.67 3055.01,3604.67 3025.01,3632.67 3055.01,3632.67 3025.01,3658.67 3055.01,3658.67 3925.01,3664.67 3905.01,3674.67 4143.01,3870.88 4143.01,3897.88 3565.01,3978.67 3565.01,4006.67 4173.01,4240.67 4151.01,4258.67 4195.01,4258.67 4131.01,4278.67 4215.01,4278.67 4173.01,4280.67 4153.01,4300.67 4195.01,4300.67 2585.01,4306.67 4175.01,4320.67 2563.01,4324.67 2607.01,4324.67 2543.01,4344.67 2627.01,4344.67 2585.01,4346.67 2565.01,4366.67 2607.01,4366.67 2587.01,4386.67
  other v2: 2846.57,3285.04
  other v3: 4349.55,2470.94 4351.19,4382.73
LED1: R3.2 U1.58 | length 80.9
  Top Layer w6: R3.2@3101.01,3312.37 3102.71,3312.37 3120.51,3330.17 U1.58
LED1_1: LED1.1 R1.2 | length 97.1
  Top Layer w6: R1.2 3854.71,2747.37 LED1.1@3941.01,2747.37
LED2: R4.2 U1.57 | length 106.9
  Top Layer w6: R4.2@3041.01,3312.37 3067.31,3338.67 3085.01,3338.67 3100.81,3354.47 U1.57
LED2_1: LED2.1 R8.1 | length 115.3
  Bottom Layer w6: LED2.1 1975.51,4926.67 1995.01,4926.67 2012.01,4909.67 2012.01,4906.67 R8.1@2012.01,4873.67
LED5_2: C23.1 D5.1 LED5.2 pad.1@4941.01,1750.67 Q4.3 | length 767.1
  Top Layer w40: Q4.3@4594.81,2230.87 4594.81,2194.07 D5.1 4703.61,2026.07 4857.01,1872.67 v2(4931.01,1872.67) ; C23.1 v2(4931.01,1872.67) ; pad.1@4941.01,1750.67 4941.01,1862.67 v2(4931.01,1872.67)
  Bottom Layer w6: LED5.2@4861.81,1943.47 4931.01,1874.17 v2(4931.01,1872.67)
LED_1: LED.1 R3.1 | length 168.9
  Top Layer w6: R3.1 3101.01,3240.67 3127.01,3214.67 3193.01,3214.67 3228.81,3178.87 LED.1
LED_3: LED.3 R4.1 | length 159.1
  Top Layer w6: R4.1 3041.01,3188.67 3103.21,3126.47 LED.3
MISO: U1.22 U6.4 U7.5 | length 967.4
  Top Layer w6: U1.22 3140.21,3769.47 v2(3141.01,3768.67) ; U6.4 3704.71,3822.97 v2(3713.01,3814.67) ; v2(3729.01,3644.67) 3761.01,3644.67 3787.41,3618.27 U7.5
  Bottom Layer w6: v2(3141.01,3768.67) 3183.01,3810.67 3359.01,3810.67 3382.21,3833.87 3639.01,3833.87 3639.48,3833.86 3693.81,3833.87 v2(3713.01,3814.67) 3729.01,3798.67 v2(3729.01,3644.67)
MOSI: U1.23 U6.3 U7.3 | length 937.3
  Top Layer w6: U1.23 v2(3121.01,3868.67) ; U6.3 3715.01,3842.67 v2(3743.01,3814.67) ; U7.3 3761.81,3714.47 v2(3762.32,3714.96)
  Bottom Layer w6: v2(3121.01,3868.67) 3167.01,3822.67 3351.01,3822.67 3375.61,3847.27 3639.01,3847.27 3710.41,3847.27 v2(3743.01,3814.67) 3762.32,3795.36 v2(3762.32,3714.96)
NRST: C9.2 R2.1 SW1.1 U1.7 | length 709.7
  Top Layer w6: U1.7@3309.51,3573.17 3345.51,3573.17 3365.01,3592.67 3427.01,3592.67 3441.01,3606.67 SW1.1 3441.01,3874.67 ; R2.1 3350.91,3854.87 C9.2 3303.61,3905.07 3328.51,3929.87 3389.11,3930.67 3442.11,3877.67
NSS1: R20.1 U1.20 U6.5 | length 572.1
  Top Layer w6: U1.20 3179.61,3768.67 v2(3181.01,3768.67) ; R20.1@3601.71,3810.27 3601.71,3803.27 U6.5
  Bottom Layer w6: v2@3179.01,3770.67 v2(3181.01,3768.67) 3210.81,3798.47 3589.91,3798.47 v2@3601.71,3810.27
  other v2: 3601.69,3810.24
NSS2: R34.2 U1.24 U7.2 | length 866.4
  Top Layer w6: U1.24 3100.81,3766.67 v2(3101.01,3766.67) ; R34.2@3639.01,3672.37 3639.01,3706.67 3659.01,3726.67 3713.01,3726.67 3736.21,3703.47 U7.2
  Bottom Layer w6: v2(3101.01,3766.67) 3101.01,3764.67 3125.01,3740.67 3192.01,3740.67 3236.31,3785.07 3564.61,3785.07 3639.01,3710.67 v2(3639.01,3670.67)
PWM0: Q1.1 R10.2 U1.14 | length 1749.6
  Top Layer w6: Q1.1 2201.01,4609.77 2201.01,4576.67 2420.01,4357.67 R10.2 ; v2(2729.25,4059.84) 2687.01,4017.6 2687.01,3876.67 2713.01,3850.67 2853.01,3850.67 2863.01,3840.67 2863.01,3788.67 2877.01,3774.67 2911.01,3774.67 2989.01,3696.67 3265.01,3696.67 3279.31,3710.97 U1.14@3309.51,3710.97
  Bottom Layer w6: v2(2479.01,4358.67) 2729.25,4108.43 v2(2729.25,4059.84)
PWM1: Q2.1 R11.2 U1.15 | length 1783.3
  Top Layer w6: U1.15 3362.91,3730.57 3383.61,3751.27 v2@3383.61,3903.17 ; v2(4257.01,4286.67) 4290.91,4286.67 R11.2
  Bottom Layer w6: v2@3383.61,3903.17 3413.51,3933.07 3903.41,3933.07 v2(4257.01,4286.67) 4257.01,4360.67 4487.01,4590.67 v2(4547.01,4590.67) v2@4545.01,4590.67
  other v2: 3383.58,3903.15
PWM2: Q3.1 R14.2 U1.16 | length 2605.2
  Top Layer w6: Q3.1 2303.91,2252.67 2331.01,2252.67 2514.01,2435.67 v2(2513.98,2485.7) ; v2(3251.01,3718.67) 3282.61,3750.27 U1.16
  Bottom Layer w6: v2(2513.98,2485.7) 2514.01,2535.67 2689.01,2710.67 2689.01,2808.67 2689.01,3930.67 2709.01,3950.67 2881.01,3950.67 3115.01,3716.67 3249.01,3716.67 v2(3251.01,3718.67)
PWM3: Q4.1 R17.2 U1.17 | length 2471.2
  Top Layer w6: U1.17 3254.51,3821.17 3261.01,3814.67 3261.01,3786.67 3280.71,3766.97 3363.11,3766.97 v2(3363.11,3763.78) ; v2(3981.01,3664.67) 3981.01,3472.67 4073.01,3380.67 4073.01,2848.57 4268.01,2653.77 4268.01,2603.67 4312.01,2603.67 4557.01,2358.67 4557.01,2321.57 Q4.1
  Bottom Layer w6: v2(3363.11,3763.78) 3460.9,3763.78 3602.01,3622.67 3644,3622.67 ; 3646.01,3622.67 3952.01,3622.67 3980.01,3650.67
Q1_2: Q1.2 R9.1 | length 172.8
  Top Layer w40: Q1.2 2330.11,4586.47 R9.1
Q1_3: C20.1 D2.1 LED2.2 pad.2 Q1.3 | length 673
  Top Layer w40: pad.2 v2(1880.81,5011.77) 1916.61,5011.77 2118.41,4810.07 2163.21,4765.27 Q1.3
  Bottom Layer w6: v2(1880.81,5011.77) 1891.81,5000.77 LED2.2@1891.81,4893.47
R12_1: Q2.2 R12.1 | length 235.8
  Top Layer w40: R12.1 4462.91,4434.57 4566.71,4538.37 Q2.2
R13_1: LED6.1 R13.1 | length 129.1
  Bottom Layer w6: R13.1@4806.01,4851.67 4918.51,4851.67 LED6.1@4930.21,4863.47
R15_1: Q3.2 R15.1 | length 156.3
  Top Layer w40: Q3.2 2321.21,2375.77 R15.1
R16_1: LED3.1 R16.1 | length 125.9
  Bottom Layer w6: LED3.1 1966.21,2001.87 2038.01,2073.67 R16.1@2044.01,2073.67
R18_1: Q4.2 R18.1 | length 200.8
  Top Layer w40: R18.1@4400.41,2414.37 4400.41,2372.37 Q4.2
R19_1: LED5.1 R19.1 | length 116.9
  Bottom Layer w6: R19.1 4894.51,2027.67 LED5.1
SCK: U1.21 U6.2 U7.4 | length 1008.5
  Top Layer w6: v2(3159.01,3868.67) U1.21 ; U6.2@3672.11,3862.37 3728.71,3862.37 3749.01,3842.67 v2(3765.01,3842.67) ; v2(3787.01,3656.67) 3787.41,3657.07 U7.4
  Bottom Layer w6: v2(3159.01,3868.67) 3159.01,3866.67 3191.01,3834.67 3339,3834.67 3367.01,3862.67 3639.01,3862.67 3745.01,3862.67 v2(3765.01,3842.67) 3787.01,3820.67 v2(3787.01,3656.67)
SCL: R22.2 U1.61 U5.6 U8.1 | length 766.5
  Top Layer w6: U1.61 3179.61,3330.87 3161.01,3312.37 3194.71,3278.67 3261.01,3278.67 3312.01,3233.67 3318.91,3233.67 3356.01,3233.67 3381.01,3258.67 3637.01,3258.67 ; 3635.01,3258.67 3637.01,3258.67 ; U8.1 3733.01,3168.67 3637.01,3258.67
SD_CARD_9: SD_CARD.9
SDA: R21.2 U1.62 U5.5 U8.16 | length 725
  Top Layer w6: U1.62 3199.31,3334.07 3221.01,3312.37 3224.31,3312.37 3246.91,3289.77 3318.91,3289.77 3318.91,3283.67 3336.01,3283.67 3359.01,3306.67 3649.01,3306.67 3763.01,3192.67 U8.16
SDIO_CK: RN2.4 SD_CARD.5 U1.53 | length 750.8
  Top Layer w6: v2(2939.01,3320.67) 2999.01,3320.67 3022.11,3343.77 U1.53 ; U1.53@3023.11,3384.87 3023.11,3502.47 v2@3024.01,3503.37
  Bottom Layer w6: v2(2715.01,3274.67) 2753.01,3274.67 2799.01,3320.67 v2(2939.01,3320.67) ; SD_CARD.5@2826.31,3645.47 2846.21,3645.47 2989.01,3502.67 v2(3023.01,3502.67)
SDIO_CMD: RN2.1 SD_CARD.3 U1.54 | length 580.1
  Top Layer w6: U1.54 3043.01,3385.37 v2(3043.01,3470.67)
  Bottom Layer w6: v2(2715.86,3370.08) 2715.91,3421.27 2771.01,3476.37 2771.01,3512.67 2793.01,3534.67 2817.21,3558.87 SD_CARD.3 2910.81,3558.87 2999.01,3470.67 v2(3043.01,3470.67)
SDIO_D0: R26.2 SD_CARD.7 U1.39 | length 405.2
  Top Layer w6: v2(2781.01,3762.8) 2781.01,3812.67 2791.01,3822.67 R26.2@2831.31,3822.67 ; U1.39 2908.51,3632.17 v2(2929.01,3652.67)
  Bottom Layer w6: v2(2781.01,3762.8) 2781.01,3742.67 2791.81,3731.87 2826.31,3731.87 2901.81,3731.87 2929.01,3704.67 v2(2929.01,3652.67)
SDIO_D1: R23.2 SD_CARD.8 U1.40 | length 467.6
  Top Layer w6: U1.40 2920.81,3612.47 v2(2961.01,3652.67)
  Bottom Layer w6: v2(2788.3,3899.21) 2788.31,3795.37 2808.61,3775.07 SD_CARD.8@2829.71,3775.07 ; SD_CARD.8 2878.61,3775.07 2887.71,3765.97 2961.01,3692.67 v2(2961.01,3652.67)
SDIO_D2: RN2.3 SD_CARD.1 U1.51 | length 442
  Top Layer w6: v2(2961.01,3438.67) 2965.01,3438.67 2982.71,3420.97 U1.51
  Bottom Layer w6: v2(2715.01,3306.67) 2716.21,3305.47 2725.31,3305.47 2760.71,3340.97 2760.71,3420.37 2812.81,3472.47 2826.31,3472.47 2927.21,3472.47 v2(2961.01,3438.67)
SDIO_D3: RN2.2 SD_CARD.2 U1.52 | length 507.4
  Top Layer w6: v2(3001.69,3448.82) 3001.71,3384.87 U1.52
  Bottom Layer w6: v2(2715.01,3338.67) 2727.01,3338.67 2740.31,3351.97 2740.31,3417.07 2791.31,3468.87 ; 2791.01,3468.67 2791.01,3492.67 2814.11,3515.77 SD_CARD.2@2826.41,3515.77 ; SD_CARD.2@2826.36,3515.74 SD_CARD.2@2826.41,3515.77 ; v2(3001.69,3448.82) 2998.81,3448.77 2935.01,3512.67 2826.41,3512.67 SD_CARD.2@2826.41,3515.77
STATE: H1.1 U1.2 | length 1052.6
  Top Layer w6: U1.2@3309.51,3474.77 3338.91,3474.77 3353.01,3460.67 3353.01,3448.67 3311.01,3406.67 3311.01,3358.67 3347.01,3322.67 v2(3861.01,3322.67)
  Bottom Layer w6: v2(3861.01,3322.67) 3883.01,3322.67 H1.1
U1_3: SW2.1 U1.3 | length 557.8
  Top Layer w6: U1.3 3349.31,3494.37 3367.01,3476.67 3367.01,3358.67 3385.01,3340.67 3687.01,3340.67 3697.01,3340.67 3719.01,3362.67 SW2.1
U1_4: U1.4
U1_8: U1.8
U1_9: U1.9
U1_10: U1.10
U1_11: U1.11
U1_12: C14.1 R6.1 U1.12 | length 183.5
  Top Layer w6: U1.12 3355.91,3671.57 3377.01,3692.67 3413.41,3692.67 3413.41,3624.77 R6.1@3411.31,3622.67
U1_13: R5.1 U1.13 | length 137.1
  Top Layer w10: U1.13 3349.61,3691.27 3411.31,3752.97 R5.1@3411.31,3762.67
U1_25: U1.25
U1_28: U1.28
U1_29: U1.29
U1_30: C15.1 U1.30 | length 277.5
  Top Layer w6: C15.1 2967.01,4054.67 2997.31,4024.37 v2(3012.71,4024.41) ; U1.30 2982.71,3860.37 v2(2993.01,3870.67)
  Bottom Layer w6: v2(2993.01,3870.67) 2993.01,3880.67 2997.01,3884.67 2997.01,4008.7 v2(3012.71,4024.41)
U1_33: U1.33
U1_34: U1.34
U1_35: U1.35
U1_36: U1.36
U1_37: U1.37
U1_38: U1.38
U1_41: U1.41
U1_42: H1.2 U1.42 | length 1247.2
  Top Layer w6: U1.42@2872.51,3573.17 2875.01,3570.67 v2(3129.01,3570.67)
  Bottom Layer w6: v2(3129.01,3570.67) 3169.01,3570.67 3207.01,3608.67 4069.01,3608.67 H1.2
U1_43: H1.3 U1.43 | length 1447.7
  Top Layer w6: U1.43 2924.21,3553.47 2939.01,3538.67 v2(3129.01,3538.67)
  Bottom Layer w6: v2(3129.01,3538.67) 3161.01,3538.67 3219.01,3596.67 4071.01,3596.67 4075.01,3592.67 4115.01,3592.67 4133.01,3610.67 4133.01,3708.67 4109.01,3732.67 H1.3
U1_46: SWD.2 U1.46 | length 286
  Top Layer w6: SWD.2 2729.01,3698.67 2801.01,3626.67 2801.01,3534.67 2841.31,3494.37 U1.46
U1_49: SWD.3 U1.49 | length 362.2
  Top Layer w6: SWD.3 2729.01,3584.67 2797.01,3516.67 2797.01,3428.67 2821.01,3404.67 2823.01,3404.67 v2(2827.01,3400.67) ; v2(2911.01,3400.67) 2943.41,3400.67 U1.49@2943.41,3398.67
  Bottom Layer w6: v2(2827.01,3400.67) v2(2911.01,3400.67)
U1_50: U1.50
U1_55: U1.55
U1_56: U1.56
U1_59: U1.59
U2_1: C1.2 C3.1 C4.2 C5.1 C6.2 LED1.2 P2.1 R7.1 U2.1 U3.2 | length 1642.6
  Top Layer w6: C5.1@3671.01,2790.27 3714.61,2790.27 3761.01,2836.67 v2(3761.01,2840.28)
  Top Layer w20: C4.2 3547.41,2996.27 3581.01,2962.67 3581.01,2960.27 3593.41,2960.27 3621.01,2932.67 3621.01,2822.67 3581.01,2782.67 3531.01,2782.67 3511.01,2802.67 U3.2@3511.01,2823.87 ; 3621.01,2904.07 3691.01,2904.67 3696.61,2904.67 v2(3761.01,2840.28)
  Top Layer w30: P2.1 3061.01,2824.67 3061.01,2922.67 C1.2@3121.01,2982.67 ; C4.2 3357.81,2996.27 U2.1 3351.61,3016.07 3293.01,3074.67 3181.01,3074.67 3121.01,3014.67 C1.2@3121.01,2982.67 ; C1.2@3121.01,2982.67 C1.2 C1.2@3121.01,2982.67
  Bottom Layer w6: v2(3761.01,2840.28) 3930.75,2840.28 v2(3941.01,2830.02)
U2_2: D1.2 L2.2 U2.2 | length 934.2
  Top Layer w30: D1.2 2921.01,2882.67 2891.01,2852.67 2891.01,2732.67 2923.01,2700.67 3319.01,2700.67 3401.01,2782.67 L2.2 3396.81,2876.97 3358.41,2915.27 U2.2
U3_4: U3.4
U4_4: U4.4
U5_7: U5.7
U6_6: U6.6
U6_7: U6.7
U6_8: U6.8
U6_14: C26.1 U6.14 | length 94.3
  Top Layer w6: U6.14 3760.71,3960.37 3779.01,3978.67 3779.01,3992.67 C26.1@3773.41,3992.67
U8_3: U8.3
U8_5: U8.5
U8_6: U8.6
U8_7: U8.7
U8_8: C27.1 U8.8 | length 90.2
  Top Layer w6: U8.8 3905.01,3084.67 3919.01,3098.67 C27.1@3937.41,3098.67
U8_9: U8.9
U8_10: C28.2 U8.10 | length 295
  Top Layer w6: C28.2 3933.01,3020.67 3967.01,3054.67 3967.01,3122.67 3961.01,3128.67 U8.10
U8_11: U8.11
U8_12: C27.2 U8.12 | length 163.6
  Top Layer w6: U8.12 3891.01,3168.67 3913.01,3146.67 3977.01,3146.67 3992.61,3131.07 C27.2
U8_14: U8.14
U8_15: U8.15
USB_1: USB.1
USB_2: R32.1 USB.2 | length 78
  Top Layer w6: USB.2 R32.1
USB_3: R31.1 R33.1 USB.3 | length 225.6
  Top Layer w6: USB.3 2873.01,3062.67 2976.71,3062.67 R31.1 3011.01,3028.37 R33.1
USB_4: USB.4
USB_D+: R33.2 U1.45 | length 564.9
  Top Layer w6: U1.45 2909.61,3514.07 2921.01,3502.67 2921.01,3456.67 2871.01,3406.67 2871.01,3187.37 2931.71,3126.67 2985.01,3126.67 R33.2@3011.01,3152.37
USB_D-: R32.2 U1.44 | length 477.1
  Top Layer w6: U1.44 2905.91,3533.77 2933.01,3506.67 2933.01,3452.67 2883.01,3402.67 2883.01,3216.67 2947.31,3152.37 R32.2@2951.01,3152.37
VBAT: C1.1 C20.2 C21.2 C22.2 C23.2 D2.2 D3.2 D4.2 D5.2 L2.1 P2.2 pad.1@1731.01,4972.67 pad.1@1913.01,1744.67 pad.1@5103.01,1902.67 pad.1@5107.01,4950.67 R8.2 R13.2 R16.2 R19.2 | length 10316.8
  Top Layer w30: P2.2 3119.01,2782.67 3169.21,2782.67 3225.21,2782.67 3238.61,2796.07 C1.1
  Top Layer w40: pad.1@1731.01,4972.67 1842.91,4971.87 1842.91,4935.97 D2.2 2081.01,4697.97 2081.01,4644.67 2605.01,4120.67 3189.01,4120.67 3265.01,4044.67 3497.01,4044.67 3549.01,4096.67 3929.01,4096.67 4031.01,4012.67 4211.01,4192.67 4327.01,4192.67 4703.01,4568.67 4703.01,4609.97 D3.2 v2(4904.42,4811.38) 4980.51,4887.47 C21.2 5104.51,4953.17 pad.1@5107.01,4950.67 ; pad.1@1913.01,1744.67 1913.01,1855.67 C22.2 2150.01,2092.67 D4.2@2167.01,2092.67 ; D4.2 D4.2@2167.01,2092.67 ; v3(2693.01,2634.67) 2693.01,2564.67 2221.01,2092.67 D4.2@2167.01,2092.67 ; v3(4213.01,2762.67) 4217.01,2762.67 4778.41,2201.27 4778.41,2160.07 4970.51,1967.87 C23.2 4980.01,1902.67 pad.1@5103.01,1902.67
  Top Layer w50: 4031.01,4012.67 4031.01,3488.67 4123.01,3396.67 4123.01,2852.67 v3(4213.01,2762.67)
  Bottom Layer w6: v2(1931.01,4848.67) 1931.01,4836.67 1936.01,4831.67 R8.2 ; R13.2 4848.01,4811.37 v2(4904.42,4811.38)
  Bottom Layer w40: v3(2693.01,2634.67) 2901.01,2842.67 3057.01,2842.67 3099,2800.67 P2.2
  Bottom Layer w50: P2.2 v3(4213.01,2762.67)
  other v2: 2088.5,2031.18 4857.01,2070.67
pads on no net: SD_CARD. USB.

## Polygon pours and split planes (outlines as drawn)
GND on Top Layer (solid): 2453.85,4592.39 2443.85,4592.39 2265.85,4414.39 2265.85,2538.39 2376.85,2415.39 2495.85,2308.39 4245.85,2308.39 4491.85,2554.39 4491.85,4308.39 4180.85,4563.39 4142.85,4541.39 3908.85,4583.39
GND on Bottom Layer (solid): 2447.79,4594.82 2441.79,4594.82 2263.79,4416.82 2263.79,2530.82 2491.79,2302.82 4257.79,2302.82 4501.79,2546.82 4501.79,4304.82 4495.79,4310.82 4493.79,4310.82 4277.79,4526.82 4277.79,4534.82 4263.79,4548.82

## Keep-outs
Keep-Out Layer:
  lines w10: 1547.25,5002.86 cw(c1717.5,5138.09) 1856.9,5304.94 ; 1550.57,1860.65 ccw(c1717.42,1721.25) 1860.83,1557.83 ; 2564.26,2751.64 ccw(c2246.68,3044.28) 2678.42,3034.35 ; 2564.26,4104.47 cw(c2246.68,3811.82) 2678.42,3821.75 ; 2750.03,2565.86 cw(c3042.68,2248.28) 3044.39,2680.13 ; 2750.03,4290.24 ccw(c3042.68,4607.83) 3032.75,4176.08 ; 3820.15,2680.02 cw(c3810.22,2248.28) 4102.87,2565.86 ; 3820.15,4176.08 ccw(c3810.22,4607.83) 4102.87,4290.24 ; 4174.48,3034.35 ccw(c4606.22,3044.28) 4288.64,2751.64 ; 4174.48,3821.75 cw(c4606.22,3811.82) 4288.64,4104.47 ; 4992.76,5300.4 cw(c5136.17,5136.98) 5303.02,4997.58 ; 4995.59,1550.57 ccw(c5134.99,1717.42) 5298.41,1860.83

## Other copper
Top Layer:
  drawing of 329 lines, arcs and shapes, not listed
  text "F401_FC V3.0" at 2663.01,2760.67 h20
  text "2021-06-05" at 2623.01,2726.67 h20
  text "BY GL" at 2591.01,2694.67 h20
Bottom Layer:
  region net VBAT: 3120.84,2795.43 3063.77,2780.24 3062.88,2808.52 3107.55,2820.41
  region net VBAT: 3125.05,2733.14 3125.05,2792.2 3152.6,2787.67 3152.6,2737.67
  region net +5V: 4072.5,3909.42 4072.5,3955.92 4050.8,3942.67 4050.8,3922.67
  region net U1_43: 4122.3,3742.83 4099.43,3702.34 4128.23,3709.21 4131.29,3714.63
  region net U1_42: 4062.07,3634.61 4094.95,3601.73 4071.13,3606.55 4066.88,3610.79
  region net NSS1: 3602.43,3798.45 3589.9,3810.97 3588.2,3800.98 3592.44,3796.74
  region net U1_30: 3003.67,3875.75 2986.64,3880.62 2993.71,3885.61 3000.31,3883.73
  region net MISO: 3724.8,3815.41 3712.27,3802.88 3722.26,3801.18 3726.5,3805.42
  region net MISO: 3713.75,3826.46 3701.22,3813.93 3699.52,3823.92 3703.76,3828.16
  region net MOSI: 3754.8,3815.41 3742.27,3802.88 3752.26,3801.18 3756.5,3805.42
  region net MOSI: 3743.75,3826.46 3731.22,3813.93 3729.52,3823.92 3733.76,3828.16
  region net SCK: 3765.75,3854.46 3753.22,3841.93 3751.51,3851.92 3755.76,3856.16
  region net SCK: 3776.79,3843.41 3764.27,3830.88 3774.25,3829.18 3778.5,3833.42
  region net PWM2: 3244.36,3708.91 3242.15,3726.49 3234.68,3719.67 3235.43,3713.67
  region net +5V: 3822.15,3540.86 3839.87,3540.86 3841.01,3532.59 3821.01,3532.59
  region net +5V: 3838.82,3749.81 3838.82,3767.53 3847.09,3768.67 3847.09,3748.67
  region net +5V: 3572.15,2912.48 3589.87,2912.48 3591.01,2920.75 3571.01,2920.75
  region net SDIO_D2: 2724.81,3300.08 2720.32,3317.22 2729.68,3314.1 2731.44,3307.37
  region net SDIO_D3: 2722.82,3329.81 2722.82,3347.53 2726.97,3341.67 2726.97,3335.67
  region net SDIO_CK: 2931.19,3311.81 2931.19,3329.53 2922.93,3323.67 2922.93,3317.67
  region net MISO: 3720.15,3652.48 3737.86,3652.48 3732,3660.75 3726,3660.75
  region net VBAT: 1922.15,4840.86 1939.87,4840.86 1934.01,4836.67 1928.01,4836.67
  region net VBAT: 4896.61,4802.52 4896.6,4820.23 4888.33,4814.37 4888.34,4808.37
  region net Q1_3: 1892.59,5012.51 1880.07,4999.98 1889.69,4998.65 1893.93,5002.89
  region net D3_1: 4941.56,4981.14 4927.24,4991.58 4927.08,4981.47 4931.99,4977.89
  region net D4_1: 1903.29,1911.43 1890.77,1923.96 1900.75,1925.66 1905,1921.42
  region net LED5_2: 4932.53,1884.38 4919.2,1872.72 4918.16,1882.8 4922.69,1886.75
  region net STATE: 3868.82,3313.81 3868.82,3331.53 3877.09,3325.67 3877.09,3319.67
  region net NSS1: 3192.79,3767.93 3180.27,3780.46 3190.26,3782.16 3194.5,3777.92
  region net U1_43: 3136.82,3529.81 3136.82,3547.53 3145.08,3541.67 3145.08,3535.67
  region net U1_42: 3136.82,3561.81 3136.82,3579.53 3145.08,3573.67 3145.08,3567.67
  region net MOSI: 3753.46,3722.77 3771.17,3722.77 3765.32,3731.04 3759.32,3731.04
  region net MOSI: 3132.79,3869.41 3120.27,3856.88 3130.26,3855.18 3134.5,3859.42
  region net MISO: 3152.79,3767.93 3140.27,3780.46 3150.26,3782.16 3154.5,3777.92
  region net SCK: 3778.15,3664.48 3795.87,3664.48 3790.01,3672.75 3784.01,3672.75
  region net SCK: 3170.81,3868.37 3157.23,3856.99 3167.02,3854.41 3171.64,3858.28
  region net SDIO_D1: 2952.15,3660.48 2969.87,3660.48 2964.01,3668.75 2958.01,3668.75
  region net SDIO_D0: 2772.15,3754.99 2789.87,3754.99 2784.01,3746.72 2778.01,3746.72
  region net SDIO_D0: 2920.15,3660.48 2937.86,3660.48 2932,3668.75 2926,3668.75
  region net SDIO_CMD: 2707.01,3377.89 2724.72,3377.89 2718.87,3386.16 2712.87,3386.16
  region net SDIO_CMD: 3035.2,3461.81 3035.2,3479.53 3026.93,3473.67 3026.93,3467.67
  region net SDIO_D3: 3000.96,3460.61 2990.09,3446.61 2987.14,3456.29 2990.85,3461.07
  region net SDIO_D2: 2961.75,3450.46 2949.22,3437.93 2947.52,3447.92 2951.76,3452.16
  region net SDIO_CK: 3015.2,3493.81 3015.2,3511.53 3006.93,3505.67 3006.93,3499.67
  region net U1_49: 2834.82,3391.81 2834.82,3409.53 2843.09,3403.67 2843.09,3397.67
  region net U1_49: 2903.19,3391.81 2903.19,3409.53 2894.93,3403.67 2894.93,3397.67
  region net U1_30: 3013.45,4012.62 3000.92,4025.14 2999.22,4015.16 3003.46,4010.91
  region net NSS2: 3112.81,3766.37 3099.23,3754.99 3109.02,3752.41 3113.64,3756.28
  region net NSS2: 3630.15,3678.48 3647.86,3678.48 3642,3686.75 3636,3686.75
  region net PWM0: 2720.39,4067.65 2738.11,4067.65 2732.25,4075.92 2726.25,4075.92
  region net PWM0: 2490.79,4359.41 2478.27,4346.88 2488.25,4345.18 2492.5,4349.42
  region net PWM2: 2522.85,2493.5 2505.13,2493.53 2511,2501.79 2517,2501.77
  region net PWM1: 4257.75,4274.88 4245.22,4287.41 4243.52,4277.42 4247.76,4273.18
  region net PWM1: 4248.15,4294.48 4265.87,4294.48 4260.01,4302.75 4254.01,4302.75
  region net PWM1: 3395.37,3902.41 3382.84,3914.94 3392.82,3916.64 3397.07,3912.4
  region net PWM1: 4539.2,4581.81 4539.2,4599.53 4530.93,4593.67 4530.93,4587.67
  region net PWM3: 3370.92,3754.92 3370.92,3772.64 3379.19,3766.78 3379.19,3760.78
  region net +3.3V_SENSOR: 3845.2,3265.81 3845.2,3283.53 3836.93,3279.67 3836.93,3269.67
  region net +3.3V_SENSOR: 3730.15,3156.48 3747.86,3156.48 3744,3164.75 3734,3164.75
  region net +3.3V_SENSOR: 3474.82,3219.81 3474.82,3237.53 3483.09,3233.67 3483.09,3223.67
  region net +3.3V_SENSOR: 3605.2,3219.81 3605.2,3237.53 3596.93,3233.67 3596.93,3223.67
  region net +3.3V: 3303.07,3318.96 3320.78,3318.96 3321.92,3310.69 3301.92,3310.69
  region net +3.3V: 3304.11,3317.91 3304.11,3335.63 3295.84,3331.77 3295.85,3321.77
  region net +3.3V: 2792.82,3361.81 2792.82,3379.53 2801.09,3375.67 2801.09,3365.67
  region net +3.3V: 2878.82,3431.81 2878.82,3449.53 2887.09,3445.67 2887.09,3435.67
  region net +3.3V: 2916.68,3898.44 2905.31,3884.86 2910.89,3878.65 2923.78,3894.04
  region net +3.3V: 2906.78,3908.35 2893.2,3896.97 2886.98,3902.55 2902.38,3915.44
  region net +3.3V: 2758.32,3920.28 2758.32,3937.99 2766.59,3939.13 2766.59,3919.13
  region net +3.3V: 2753.8,3917.79 2738.84,3927.28 2733.24,3921.05 2750.54,3910.07
  region net +3.3V: 3509.17,3659.81 3509.17,3677.53 3500.9,3676.17 3500.9,3661.17
  region net +3.3V: 3130.85,3678.93 3114.09,3673.19 3109.26,3680.27 3130.33,3687.49
  region net +3.3V: 3132.82,3659.81 3132.82,3677.53 3141.09,3676.17 3141.09,3661.17
  region net +3.3V: 3238.8,3521.41 3226.27,3508.88 3231.31,3502.23 3245.45,3516.37
  region net +3.3V: 3274.15,3390.48 3291.87,3390.48 3293.01,3398.75 3273.01,3398.75
  region net +3.3V: 2944.15,3036.48 2961.87,3036.48 2958.01,3044.75 2948.01,3044.75
  region net +3.3V: 3407.75,3208.46 3395.22,3195.93 3388.57,3200.97 3402.71,3215.11
  region net +5V: 3073.25,3985.13 3072.37,3967.43 3080.92,3972.87 3081.22,3978.87
  region net U2_1: 3941.75,2841.81 3929.22,2829.28 3928.63,2838.16 3932.87,2842.4
  region net U2_1: 3768.82,2831.42 3768.82,2849.14 3777.09,2843.28 3777.09,2837.28
  region net SDIO_D1: 2797.16,3891.4 2779.45,3891.4 2785.31,3883.13 2791.31,3883.13
  region net +3.3V: 2724.82,3893.81 2724.82,3911.53 2729,3912.67 2729,3892.67
  region net +3.3V: 2724.82,3893.81 2724.82,3911.53 2729,3912.67 2729,3892.67
  region net SDIO_CK: 2722.82,3265.81 2722.82,3283.53 2731.09,3277.67 2731.09,3271.67
  region net SDIO_D2: 2851.87,3464.95 2851.87,3479.95 2860.87,3475.45 2860.87,3469.45
  region net SDIO_D3: 2810.05,3501.93 2800.76,3513.7 2797.46,3503.36 2801.2,3498.62
  region net SDIO_D3: 2851.94,3505.17 2851.94,3520.17 2860.94,3515.67 2860.94,3509.67
  region net SDIO_CMD: 2851.87,3551.37 2851.87,3566.37 2860.87,3561.87 2860.87,3555.87
  region net SDIO_CMD: 2815.36,3545.09 2800.69,3548.24 2794.47,3540.37 2801.45,3538.87
  region net SDIO_CK: 2851.87,3632.31 2851.87,3647.31 2860.87,3635.05 2860.87,3626.56
  region net SDIO_D0: 2851.87,3724.37 2851.87,3739.37 2860.87,3734.87 2860.87,3728.87
  region net SDIO_D0: 2800.69,3739.36 2800.69,3724.36 2791.82,3728.86 2791.82,3734.86
  region net SDIO_D1: 2800.69,3788.83 2800.69,3775.49 2791.69,3787.74 2791.69,3796.23
  region net SDIO_D1: 2851.87,3767.57 2851.87,3782.57 2860.87,3778.07 2860.87,3772.07
  region net R19_1: 4906.07,2026.69 4895.46,2016.09 4892.34,2025.58 4896.58,2029.82
  region net LED5_2: 4875.94,1918.65 4886.55,1929.25 4889.73,1919.71 4885.49,1915.46
  region net LED2_1: 1964.42,4927.12 1975.03,4937.73 1977.63,4928.79 1973.39,4924.55
  region net Q1_3: 1886.82,4927.45 1900.38,4921.03 1894.81,4933.62 1888.81,4936.46
  region net R16_1: 1981.79,2006.85 1971.19,2017.45 1980.73,2020.64 1984.97,2016.39
  region net D4_1: 1972.35,1938.36 1978.61,1952 1966.15,1946.43 1963.4,1940.43
  region net R13_1: 4897.77,4856.94 4908.38,4846.34 4893.35,4848.64 4887.35,4854.64
  region net D3_1: 4896.55,4936.09 4885.94,4946.69 4895.49,4949.88 4899.73,4945.63
  region net VBAT: 4861.94,4819.79 4866.11,4805.39 4874.62,4808.37 4872.88,4814.37
  region net R13_1: 4823.98,4857.75 4820.11,4843.26 4830.86,4848.64 4832.46,4854.64
  region net VBAT: 1955.96,4823.32 1952.1,4837.81 1943.61,4834.7 1945.21,4828.7
  region net LED2_1: 2005.87,4891.58 2020.36,4887.71 2014.98,4898.46 2008.98,4900.06
  region net R16_1: 2034.29,2059.34 2023.68,2069.95 2020.5,2060.4 2024.74,2056.16
  region net R19_1: 4828.11,2036.08 4831.97,2021.58 4840.46,2024.7 4838.86,2030.7
  region net +3.3V: 2704,3833.67 2754,3833.67 2739,3863.67 2719,3863.67
  region net STATE: 4072.61,3501.67 4062.01,3512.28 4058.83,3502.73 4063.07,3498.49

## Silkscreen, mask and mechanical layers (free items; w line width, h text height)
Top Overlay:
  text "+" at 1744.4,4923.28 h30 r225
  text "+" at 5064.4,4909.28 h30 r225
  text "+" at 2888.4,4049.28 h30 r225
  text "+" at 4097.61,3999.28 h30 r135
  text "+" at 2782.4,3767.28 h30 r225
  text "HC-05" at 4042.01,3662.67 h30 r90
  text "+" at 3220.4,3025.28 h30 r225
  text "+" at 3420.4,2871.28 h30 r225
  text "+" at 3980.4,2723.28 h30 r225
  text "+" at 3788.4,2707.28 h30 r225
  text "+" at 3171.61,2699.28 h30 r135
  text "-" at 2940.01,2676.67 h30 r90
  text "+" at 5071.61,1949.28 h30 r135
  text "+" at 1949.61,1791.28 h30 r135